# Altium PCB ADC_Klipper_Board.PcbDoc (part 2 of 2)
Units mm, origin at the board's own origin, x right, y up, seen from the top; angles counter-clockwise.
Board outline 69 x 45 mm, 4 copper layers (F.Cu, In1.Cu, In2.Cu, B.Cu); 84 components, 97 nets, 307 pads, 172 vias.
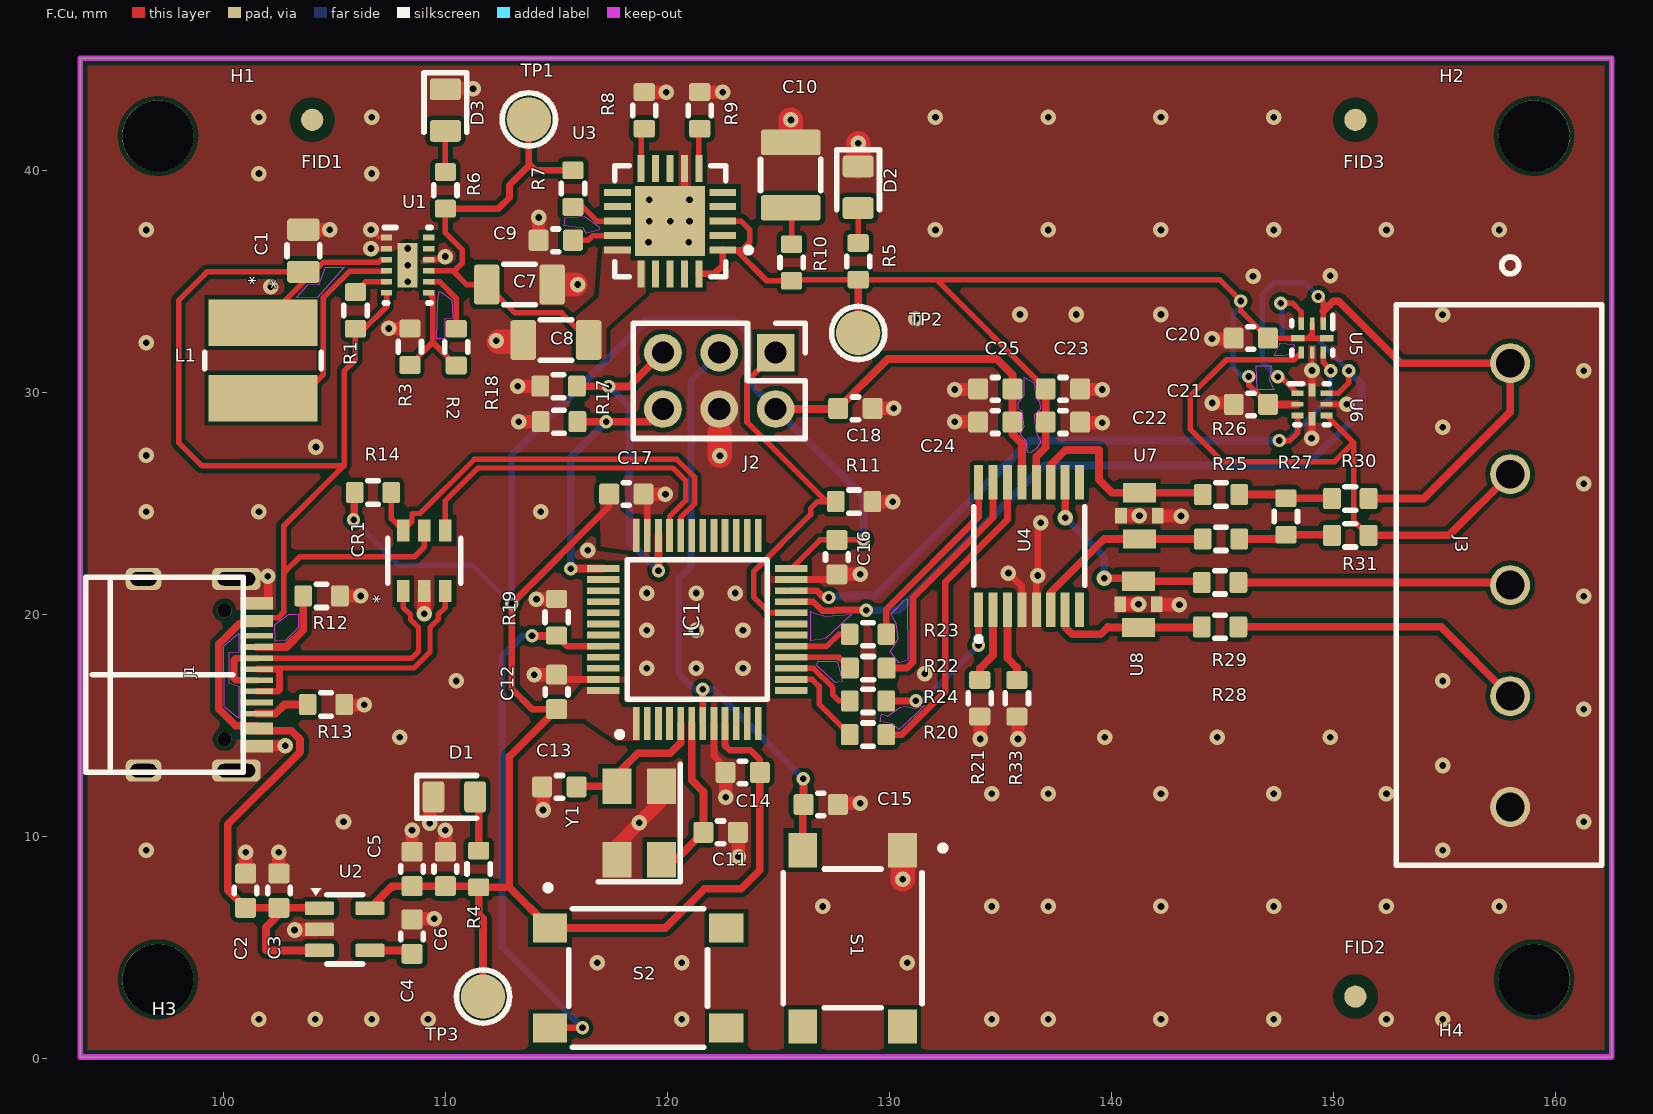
[diagram p0: F.Cu view]

## Polygon pours and split planes (outlines as drawn) (continued)
GND on F.Cu "F.Cu-GND-2" (solid, remove dead copper, pour order 30065): 135.759,21.279 135.971,21.491 135.693,22.014 135.369,21.881 135.236,21.557
GND on F.Cu "F.Cu-GND-1" (solid, remove dead copper, pour order 30062): 136.475,21.083 136.775,21.083 137.013,21.636 136.69,21.771 136.34,21.77
+3V3 on F.Cu "F.Cu-+3V3" (solid, remove dead copper, pour order 30054): 116.96,25.9 117.86,25.89 117.88,24.72 118.36,24.36 118.83,24.36 118.83,22.83 117,23.07
GND on F.Cu "F.Cu-GND" (solid, remove dead copper, pour order 30061): 119.445,10.908 119.021,11.332 118.491,10.872 118.737,10.624 118.985,10.378
+3V3 on B.Cu "B.Cu-+3V3" (solid, remove dead copper, pour order 30057): 112.84,24.632 113.14,24.632 112.707,24.506 113.03,24.641 112.707,24.506
GND on B.Cu "B.Cu-GND" (solid, remove dead copper, pour order 30051): 93.57,45.06 162.54,45.07 162.55,0.08 93.55,0.08 93.55,45.08
GND on In1.Cu "In1.Cu-GND" (solid, remove dead copper, pour order 30066): 93.5,45.1 162.6,45.1 162.5,0 93.6,0.1
GND on In2.Cu "In2.Cu-GND" (solid, remove dead copper, pour order 30067): 93.5,45.1 162.6,45.1 162.5,0 93.6,0.1

## Keep-outs
F.Cu:
  region: 116.95,37.45 116.89,37.32 116.34,37.2 116.22,37.42 115.35,37.52 115.4,37.89 116.25,37.95
  region: 136.53,30.45 136.59,29.78 136.77,29.6 136.8,29.27 136.54,29 136.59,28.23 136.83,27.8 136.65,27.5 136.38,27.29 136.23,27.32 136.16,27.83 135.9,28.13 136.08,28.47 135.99,29.18 135.8,29.27 135.81,29.56 136.08,29.89 136.08,30.7
  region: 110.29,34.2 110.34,33.36 109.98,33.34 109.98,32.43 109.61,32.43 109.66,34.1 109.71,34.52 109.75,34.57
  region: 131.17,15.49 130.43,14.83 130.13,15.1 129.6,15.18 129.66,15.55 129.93,15.44 130.5,15.84 130.69,15.89 131.15,15.79 131.57,15.9
  region: 130.83,17.96 130.43,17.83 130.05,18.34 130.41,18.93 130.31,19.61 130.08,20.03 130.65,20.66 130.81,20.73
  region: 105.45,35.65 104.22,34.29 103.31,34.3 103.8,34.87 104.32,34.89 104.6,35.66 104.61,35.66
  region: 147.12,30.59 147.33,30.13 146.58,30.15 146.58,30.14 146.54,31.23 147.22,31.23
  region: 126.65,20.07 127.14,19.94 128.32,20.03 127.11,18.91 126.47,18.84 126.47,20.16
  region: 100.68,18.32 100.25,18.29 100.23,16.93 100.68,16.78 100.68,15.35 100.04,15.86 100.01,18.59 100.68,19.16
  region: 127.88,17.01 127.57,16.93 126.73,17.73 126.77,17.91 127.66,17.91
  region: 148.23,32.2 148.25,31.74 147.74,31.68 147.35,31.68 147.59,32.16 147.59,32.17 147.6,32.23
  region: 103.37,19.41 102.79,18.83 102.33,18.8 102.32,19.55 102.94,20.03 103.29,20.02 103.37,20.04
B.Cu:
  region: 146.54,31.23 145.84,31.22 145.76,33.33 146.31,33.94 146.54,34.29
  region: 122.15,32.93 121.57,32.48 121.37,31.42 120.6,30.13 119.56,30.28 118.62,29.5 117.19,31 118.66,32.35 119.4,33.03
Edge.Cuts:
  lines w0: 93.55,0.075 162.55,0.075 162.55,45.075 93.55,45.075 93.55,0.075
  lines w0.254: 93.55,0.075 162.55,0.075 162.55,45.075 93.55,45.075 93.55,0.075

## Silkscreen, mask and mechanical layers (free items; w line width, h text height)
F.CrtYd:
  lines w0.254: 116.9,34.535 123.325,34.535 123.325,40.935 116.9,40.935 116.9,34.535 ; 147.895,28.342 150.195,28.342 150.195,30.617 147.895,30.617 147.895,28.342 ; 147.91,31.342 150.21,31.342 150.21,33.617 147.91,33.617 147.91,31.342

## Text inside footprints (layer, text, board x,y; h text height)
CR1: F.Fab "*" at 107.719,21.818 h1 r90; F.Fab "*" at 107.719,21.818 h1 r90; F.SilkS "*" at 107.527,20.508 h1 r90
L1: F.Fab "*" at 101.897,33.33 h1 r90; F.Fab "*" at 101.663,33.574 h1 r270; F.SilkS "*" at 101.897,34.854 h1 r90; F.SilkS "*" at 101.663,35.098 h1 r270